# Altium PCB SystemStatusBoardPcbDoc.PcbDoc
Units mil, origin at the board's own origin, x right, y up, seen from the top; angles counter-clockwise.
Board outline 2900 x 2005 mil, 2 copper layers (Top Layer, Bottom Layer); 51 components, 32 nets, 205 pads, 46 vias.
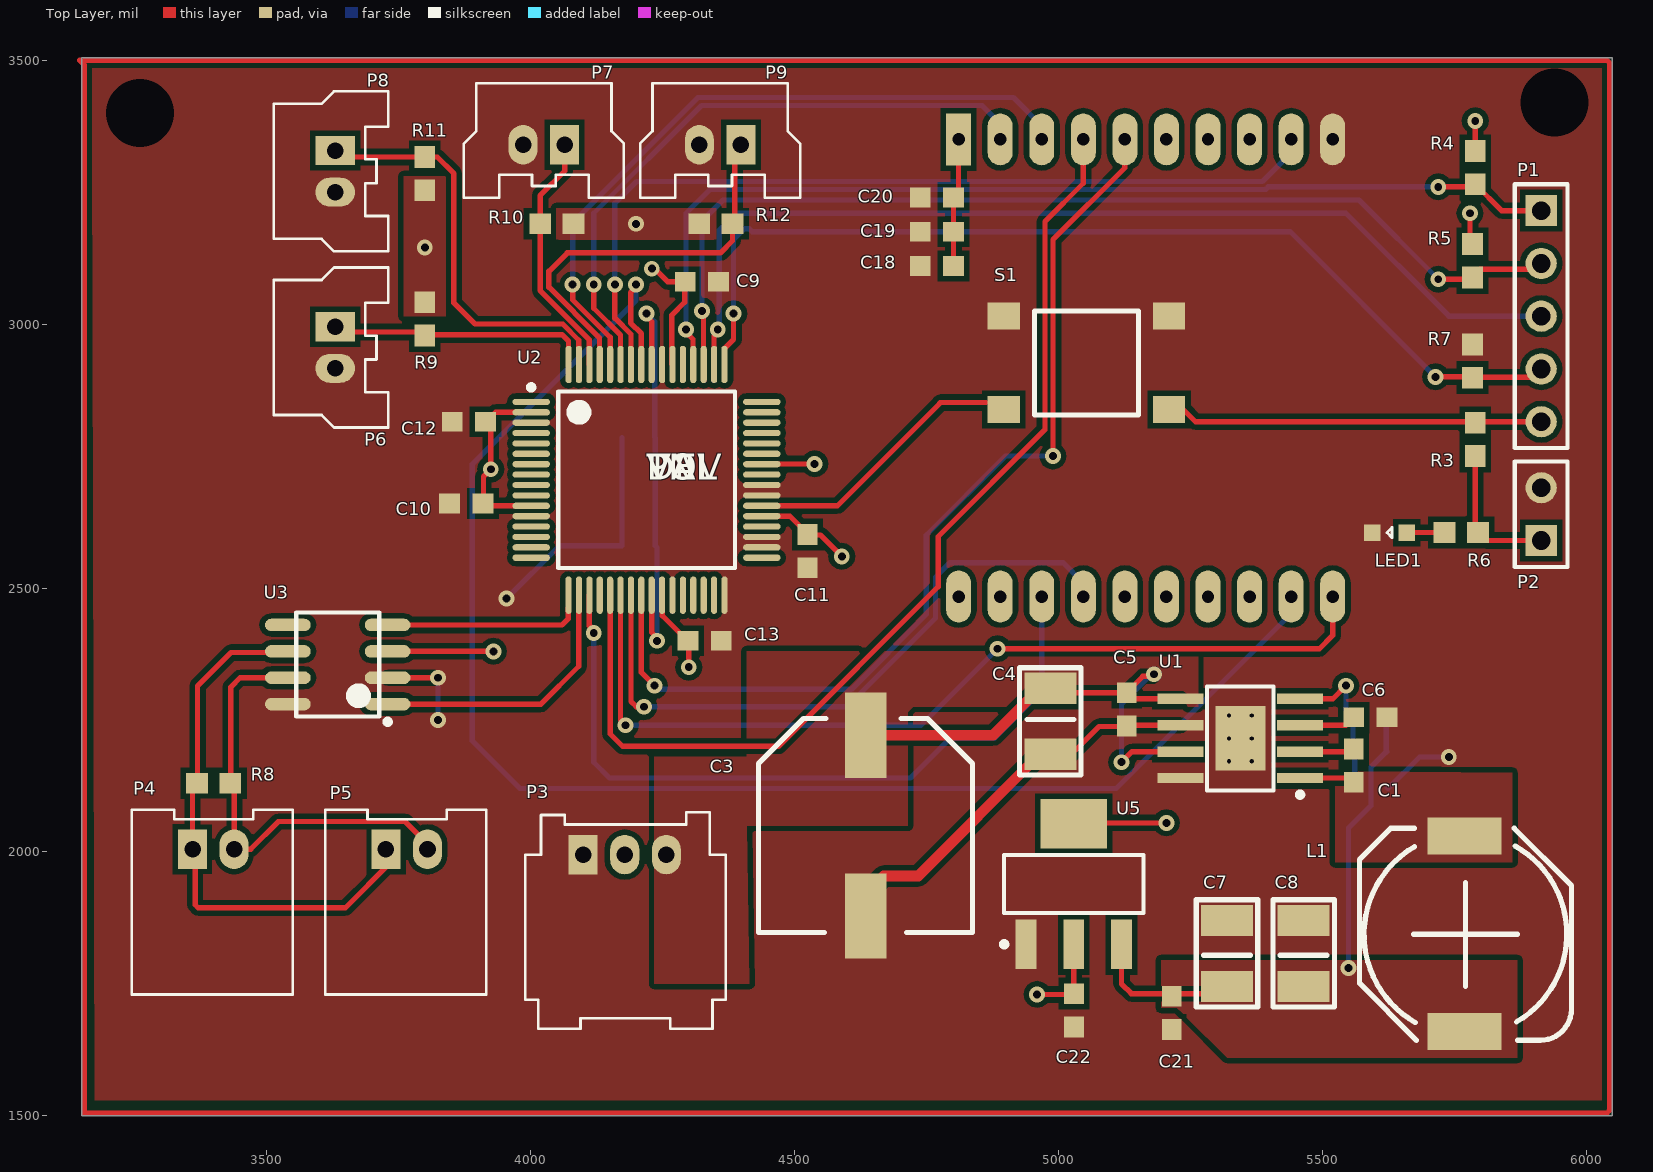
[diagram p0: Top Layer view]
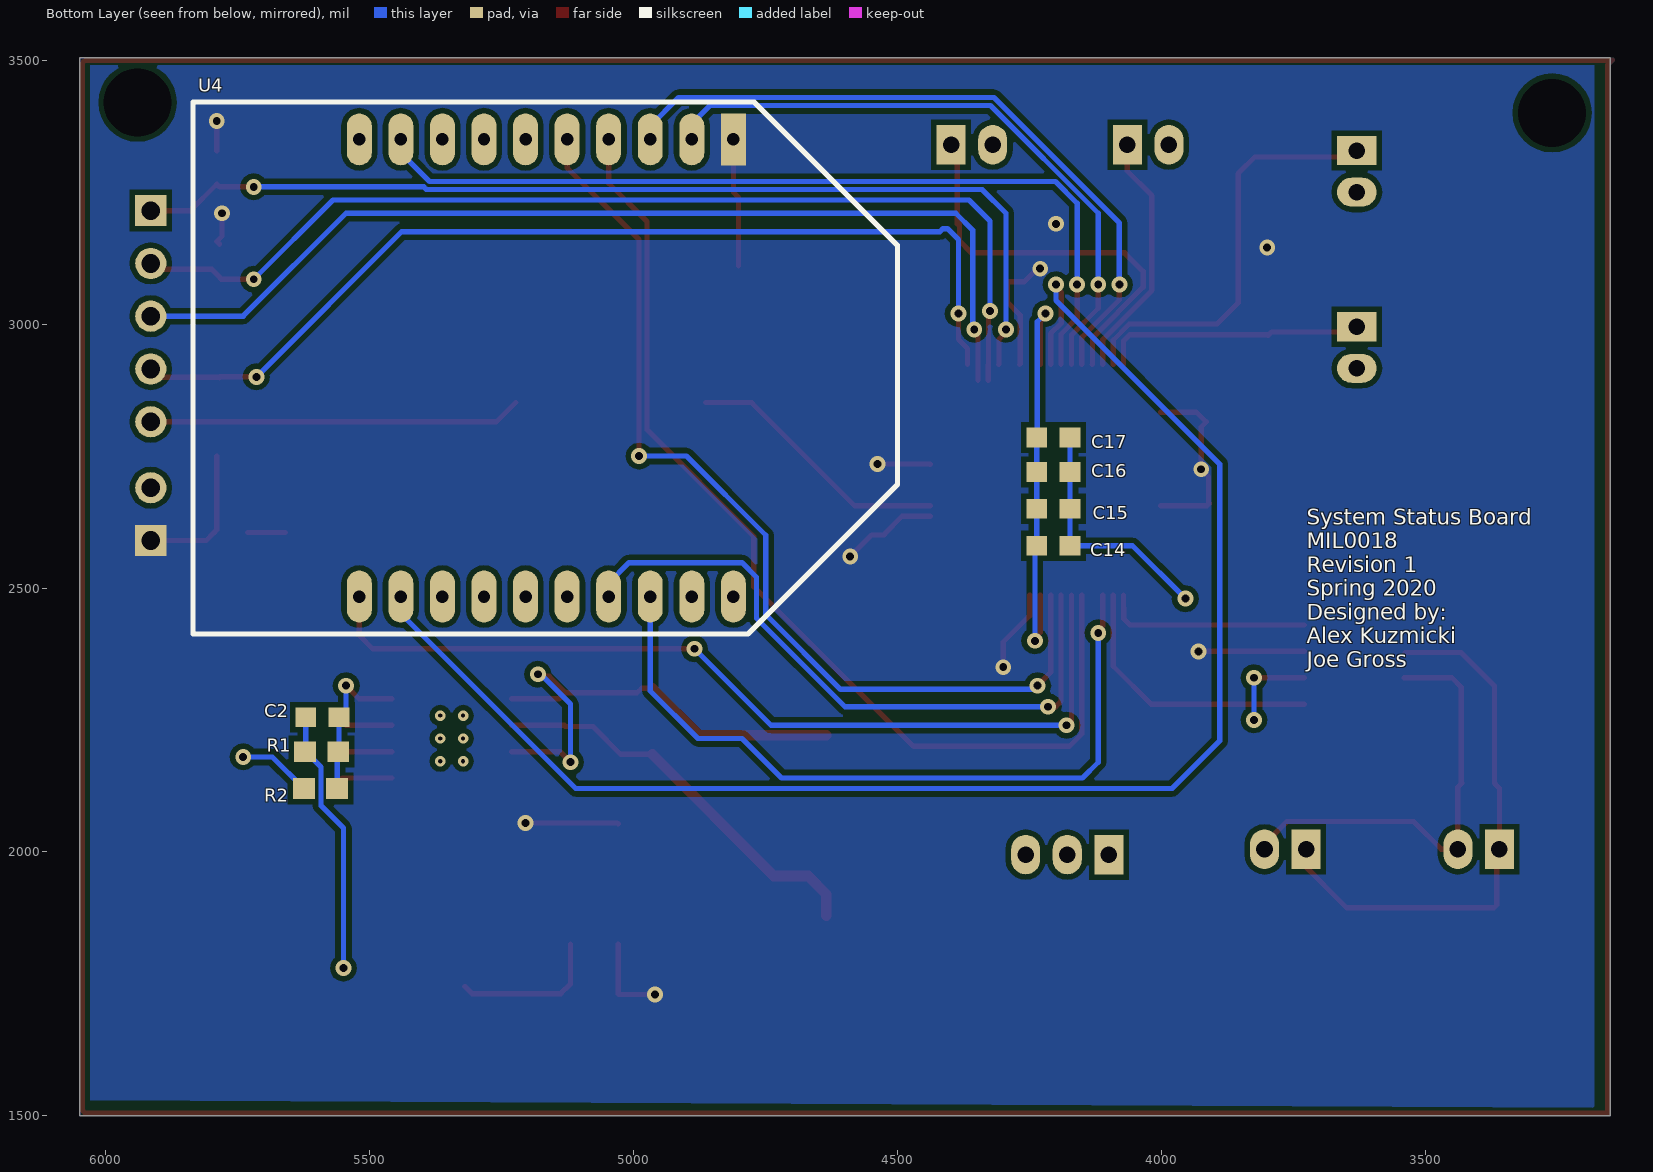
[diagram p1: Bottom Layer view, seen from below]

## Layer stack, top to bottom
Top Solder: solder mask 0.4, Solder Resist, Dk 3.5
Top Layer: signal copper 1.4
Dielectric 1: dielectric 12.6, FR-4, Dk 4.8
Bottom Layer: signal copper 1.4
Bottom Solder: solder mask 0.4, Solder Resist, Dk 3.5

## Board outline
3150,1500 6050,1500 6050,3505 3150,3505

## Design rules (kind name [scope] priority, off if disabled: settings)
Clearance [All] p1: gap=10 ignorepadtopadclearanceinfootprint=FALSE except(0: Arc-Hole Track-Hole SMDPad-Hole THPad-Hole Via-Hole Fill-Hole Poly-Hole Region-Hole Text-Hole; 5: Track-Track Track-SMDPad SMDPad-SMDPad; 7: Track-Via)
HoleSize [All] p1: absolutevalues=TRUE maxlimit=150 minlimit=10 maxpercent=80.000 minpercent=20.000
MinimumAnnularRing [All] p1: minimumring=7
MinimumSolderMaskSliver [All] p1: minsoldermaskwidth=1
PolygonConnect [All] p1: connectstyle=Direct reliefconductorwidth=10 reliefentries=4 polygonreliefangle="90 Angle" airgapwidth=10
RoutingVias [All] p1: holewidth=10 width=22 viastyle="Through Hole" minholewidth=10 minwidth=22 maxholewidth=100 maxwidth=150
SilkToSolderMaskClearance [IsPad] p1: minsilkscreentomaskgap=5 clearancetoexposedcopper=TRUE
SolderMaskExpansion [All] p1: expansion=4
Width [All] p1: maxlimit=150 minlimit=8 preferedwidth=10
27 further rules are at their usual default settings.

## Classes and differential pairs
component class SystemStatusBoard: C10 C11 C12 C13 C14 C15 C16 C17 C18 C19 C20 C21 C22 LED1 P1 P2 P3 P4 P5 P6 P7 P8 P9 R3 R4 R5 R6 R7 R8 R9 R10 R11 R12 S1 U2 U3 U4 U5
component class 24Vto5Vat1A-R1: C1 C2 C3 C4 C5 C6 C7 C8 L1 R1 R2 U1

## Components (designator, comment, footprint, x,y, rotation, side; value= is the part's Value field where it differs from the comment)
C1 "Cap" CAPC0603 5560,2163.5 r270 top value=470nF
C2 "Cap" CAPC0603 5590,2255 r180 bottom value=75pF
C3 "EEHZA1H101P" EEHZA1H101P 4635,2050 r0 top value=100uF
C4 "Cap" CAP1210 4985,2310.98 r90 top value=10uF
C5 "Cap" CAPC0603 5130,2270 r270 top value=100nF
C6 "Cap" CAPC0603 5591.5,2255 r0 top value=10uF
C7 "Cap" CAP1210 5320,1744.21 r270 top value=47uF
C8 "Cap" CAP1210 5465,1744.21 r270 top value=47uF
C9 "Cap" CAPC0603 4325,3080 r0 top value=0.1uF
C10 "Cap" CAPC0603 3878.5,2660 r180 top value=0.1uF
C11 "Cap" CAPC0603 4525,2570 r270 top value=0.1uF
C12 "Cap" CAPC0603 3883.5,2815 r180 top value=0.1uF
C13 "Cap" CAPC0603 4330,2400 r0 top value=2.1uF
C14 "Cap" CAPC0603 4205,2580 r180 bottom value=0.1uF
C15 "Cap" CAPC0603 4205,2650 r180 bottom value=0.1uF
C16 "Cap" CAPC0603 4205,2720 r180 bottom value=1.0uF
C17 "Cap" CAPC0603 4205,2785 r180 bottom value=2.2uF
C18 "Cap" CAPC0603 4770,3110 r180 top value=10uF
C19 "Cap" CAPC0603 4770,3175 r180 top value=1uF
C20 "Cap" CAPC0603 4770,3240 r180 top value=47pF
C21 "Cap" CAPC0603 5215,1695 r270 top value=1uF
C22 "Cap" CAPC0603 5030,1700 r270 top value=1uF
L1 "MSS1048-563MLB" MSS1048-563MLB 5770,1845 r0 top value=56uH
LED1 "LED" LED0603 5627.52,2605 r180 top
P1 "Header 5" HDR1X5 5915,3215 r270 top
P2 "Header 2" HDR1X2 5915,2590 r90 top
P3 "3pos RA sherlock connector" MOLEX-HDR-1X3-SHERLOCK-RA 4100,1995 r180 top
P4 "2-pin Horz Sherlock" MOLEX-HDR-1X2-SHERLOCK-HORZ 3360,2005 r180 top
P5 "2-pin Horz Sherlock" MOLEX-HDR-1X2-SHERLOCK-HORZ 3726.26,2005 r180 top
P6 "2-pin Vert Sherlock" MOLEX-HDR-1X2-SHERLOCK-VERT 3630,2995 r90 top
P7 "2-pin Vert Sherlock" MOLEX-HDR-1X2-SHERLOCK-VERT 4065,3340 r0 top
P8 "2-pin Vert Sherlock" MOLEX-HDR-1X2-SHERLOCK-VERT 3630,3328.74 r90 top
P9 "2-pin Vert Sherlock" MOLEX-HDR-1X2-SHERLOCK-VERT 4398.74,3340 r0 top
R1 "Res" RES0603 5591.5,2190 r180 bottom value=40.2k
R2 "Res" RES0603 5593.5,2120 r0 bottom value=10k
R3 "Res" RES0603 5790,2781.5 r90 top value=10k
R4 "Res" RES0603 5790,3296.5 r270 top value=10k
R5 "Res" RES0603 5785,3120 r270 top value=10k
R6 "Res" RES0603 5763.5,2605 r180 top value=10k
R7 "Res" RES0603 5785,2930 r90 top value=10k
R8 "Res" RES0603 3400,2130 r180 top value=120
R9 "Res" RES0603 3800,3010 r270 top value=1M
R10 "Res" RES0603 4050,3190 r180 top value=1M
R11 "Res" RES0603 3800,3285 r90 top value=1M
R12 "Res" RES0603 4351.5,3190 r0 top value=1M
S1 "Button" PTS645xxxxSMTR92 5053.5,2926.42 r180 top
U1 "LMR23610ADDAR" LMR23610ADDAR 5345,2215 r180 top
U2 "TM4C123GH6PMT7R" PM0064A_N 4220,2705 r0 top value=Value
U3 "SN65HVD230DR" SOIC-8pin 3635,2355 r180 top
U4 "XBee" XBee 4811.34,3350 r270 bottom
U5 "TLV1117LV33DCYR" SOT23-4N 5029.45,1939.17 r90 top

## Footprints (in the part's own frame and the unit in brackets; to place one, negate y for a bottom-side part, rotate by r counter-clockwise, add the part's x,y. Pads: shape width x height; smd on the part's side, far side on the other; paste and mask are expansions set on the pad)
CAP1210 [mm]
  rect 1.5x2.5 smd: 1(-0.02,0) 2(-3.2,0)
  silkscreen extent -4.2,-1.48 0.97,1.48, body extent -3.22,-1.25 0,1.26, height 2.5
CAPC0603 [mm] "Chip Capacitor, 2-Leads, Body 1.60x0.80mm, IPC Medium Density"
  rect 1x0.95 smd: 1(-0.8,0) 2(0.8,0)
  body extent -0.88,-0.48 0.87,0.48, height 0.8
EEHZA1H101P [mm] "CAP ALUM POLY HYB 100UF 50V SMD"
  rect 2x4.1 smd: 1(0,4.35) 2(0,-4.35)
  silkscreen extent -5.15,-5.15 5.15,5.15, body extent -5.24,-5.99 5.25,5.99, height 10.54
HDR1X2 [mm] "Connector; Header; 2 Position"
  rect 1.5x1.5 hole 0.9: 1(0,0)
  round 1.5 hole 0.9: 2(2.54,0)
  silkscreen extent -1.27,-1.27 3.81,1.27
HDR1X5 [mm] "Connector; Header; 5 Position"
  rect 1.5x1.5 hole 0.9: 1(0,0)
  round 1.5 hole 0.9: 2(2.54,0) 3(5.08,0) 4(7.62,0) 5(10.16,0)
  silkscreen extent -1.27,-1.27 11.43,1.27
LED0603 [mm] "Chip LED, 2-Leads, Body 1.60x0.80mm, IPC Medium Density"
  rect 0.8x0.8 smd: A(-0.825,0) C(0.825,0)
  silkscreen extent -0.13,-0.25 0.12,0.25, body extent -0.88,-0.48 0.87,0.47, height 0.8
LMR23610ADDAR [mm] "IC REG BUCK ADJ 1A SYNC 8SOPWRPD"
  rect 2.2x0.5 smd: 1(-2.875,1.905) 2(-2.875,0.635) 3(-2.875,-0.635) 4(-2.875,-1.905) 5(2.875,-1.905) 6(2.875,-0.635) 7(2.875,0.635) 8(2.875,1.905)
  rect 2.4x3.1 smd: 9(0,0)
  silkscreen extent -3,-2.5 1.6,2.83, body extent -2,-2.5 2,2.5, height 1.7
MOLEX-HDR-1X2-SHERLOCK-HORZ [mm]
  rect 1.397x1.905 hole 0.8: 1(0,0)
  oval 1.397x1.905 hole 0.8: 2(-2,0)
  silkscreen extent -4.83,-1.91 2.92,6.98, body extent -4.83,-1.91 2.87,8.59, height 5.54
MOLEX-HDR-1X2-SHERLOCK-VERT [mm]
  rect 1.397x1.905 hole 0.8: 1(0,0)
  oval 1.397x1.905 hole 0.8: 2(-2,0)
  silkscreen extent -4.85,-2.55 2.85,2.95, body extent -4.87,-2.59 2.83,2.96, height 8.5
MOLEX-HDR-1X3-SHERLOCK-RA [mm]
  rect 1.397x1.905 hole 0.8: 1(0,0)
  oval 1.397x1.905 hole 0.8: 2(-2,0) 3(-4,0)
  silkscreen extent -6.86,-2.03 2.79,8.38, body extent -6.88,-1.99 2.82,8.51, height 5.75
MSS1048-563MLB [mm] "FIXED IND 56UH 1.7A 126 MOHM"
  rect 3.56x1.78 smd: 1(0,4.7) 2(0,-4.7)
  silkscreen extent -5.06,-5.13 5.14,5.07, body extent -5.1,-5.15 5.1,5.15, height 5
PM0064A_N [mm]
  oval 1.8x0.3 smd paste-0.102 mask+0.051: 1(-5.55,3.75) 2(-5.55,3.25) 3(-5.55,2.75) 4(-5.55,2.25) 5(-5.55,1.75) 6(-5.55,1.25) 7(-5.55,0.75) 8(-5.55,0.25) 9(-5.55,-0.25) 10(-5.55,-0.75) 11(-5.55,-1.25) 12(-5.55,-1.75) 13(-5.55,-2.25) 14(-5.55,-2.75) 15(-5.55,-3.25) 16(-5.55,-3.75) 33(5.55,-3.75) 34(5.55,-3.25) 35(5.55,-2.75) 36(5.55,-2.25) 37(5.55,-1.75) 38(5.55,-1.25) 39(5.55,-0.75) 40(5.55,-0.25) 41(5.55,0.25) 42(5.55,0.75) 43(5.55,1.25) 44(5.55,1.75) 45(5.55,2.25) 46(5.55,2.75) 47(5.55,3.25) 48(5.55,3.75)
  oval 0.3x1.8 smd paste-0.102 mask+0.051: 17(-3.75,-5.55) 18(-3.25,-5.55) 19(-2.75,-5.55) 20(-2.25,-5.55) 21(-1.75,-5.55) 22(-1.25,-5.55) 23(-0.75,-5.55) 24(-0.25,-5.55) 25(0.25,-5.55) 26(0.75,-5.55) 27(1.25,-5.55) 28(1.75,-5.55) 29(2.25,-5.55) 30(2.75,-5.55) 31(3.25,-5.55) 32(3.75,-5.55) 49(3.75,5.55) 50(3.25,5.55) 51(2.75,5.55) 52(2.25,5.55) 53(1.75,5.55) 54(1.25,5.55) 55(0.75,5.55) 56(0.25,5.55) 57(-0.25,5.55) 58(-0.75,5.55) 59(-1.25,5.55) 60(-1.75,5.55) 61(-2.25,5.55) 62(-2.75,5.55) 63(-3.25,5.55) 64(-3.75,5.55)
  silkscreen extent -5.67,-4.25 4.25,4.57, body extent -4.19,-4.19 4.19,4.19, height 0.64
PTS645xxxxSMTR92 [mm] "PTS645 Series SMT 6 mm Tactile Switch"
  rect 1.555x1.3 smd: A(-3.975,2.25) A(3.975,2.25) B(-3.975,-2.25) B(3.975,-2.25)
  silkscreen extent -2.5,-2.5 2.5,2.5, body extent -3,-3 3,3, height 4.5
RES0603 [mm] "Chip Resistor, 2-Leads, Body 1.60x0.80mm, IPC Medium Density"
  rect 1.05x1 smd: 1(-0.8,0) 2(0.8,0)
  body extent -0.88,-0.48 0.87,0.47, height 0.8
SOIC-8pin [mm] "For 296-1345-1-ND"
  oval 2.2x0.6 smd: 1(-2.4,1.905) 2(-2.4,0.635) 3(-2.4,-0.635) 4(-2.4,-1.905) 5(2.4,-1.905) 6(2.4,-0.635) 7(2.4,0.635) 8(2.4,1.905)
  silkscreen extent -2.53,-2.5 2,2.88, body extent -2,-2.5 2,2.5, height 1.75
SOT23-4N [mm] "SOT223, 4-Leads, Body 6.50x7.00mm (avg), Pitch 2.30mm, IPC Medium Density"
  rect 2.4x1 smd: 1(-2.9,2.3) 2(-2.9,0) 3(-2.9,-2.3)
  rect 2.4x3.2 smd: 4(2.9,0)
  silkscreen extent -3.02,-3.35 1.4,3.47, body extent -1.85,-3.35 1.85,3.35, height 1.7
XBee [mm]
  rect 2.5x1.2 hole 0.6: 1(0,0)
  oval 2.5x1.2 hole 0.6: 2(0,-2) 3(0,-4) 4(0,-6) 5(0,-8) 6(0,-10) 7(0,-12) 8(0,-14) 9(0,-16) 10(0,-18) 11(22,-18) 12(22,-16) 13(22,-14) 14(22,-12) 15(22,-10) 16(22,-8) 17(22,-6) 18(22,-4) 19(22,-2) 20(22,0)
  silkscreen extent -1.8,-26 23.8,7.9, body extent -1.9,-26 23.8,8, height 4.06

## Part data
C1 C2 C4 C5 C6 C9 C10 C11 C12 C13 C14 C15 C16 C17 C18 C19 C20: Supplier Part Number 1=1276-1000-1-ND, Supplier 1=Digi-Key
C3: "CAP ALUM POLY HYB 100UF 50V SMD", Manufacturer 1=Panasonic, Supplier Part Number 1=P15442CT-ND, Tolerance=20%, Voltage=50V, ComponentLink1Description="Web Site", ComponentLink1URL=https://na.industrial.panasonic.com/products/capacitors/aluminum-electrolytic-capacitors/conductive-polymer-hybrid-aluminum-electrolytic/series/za-high-temp-reflow/ABA0135/model/EEHZA1H101P, ComponentLink2Description="Data Sheet", ComponentLink2URL=https://industrial.panasonic.com/cdbs/www-data/pdf/RDD0000/ABA0000C1221.pdf, ComponentLink3Description="ZA Series Technical Data", ComponentLink3URL=https://industrial.panasonic.com/cdbs/www-data/pdf/RDD0000/ABA0000COS44.pdf, Manufacturer Part Number 1=EEHZA1H101P, Supplier 1=Digi-Key
C7 C8: Supplier Part Number 1=490-6538-1-ND, Supplier 1=Digi-Key
C21 C22: Manufacturer Part Number=C0603C105K8PACTU, Supplier Part Number 1=399-3118-1-ND, Supplier 1=Digi-Key
L1: "FIXED IND 56UH 1.7A 126 MOHM", Manufacturer 1=Coilcraft, ComponentLink1Description="Web Site", ComponentLink1URL=https://www.coilcraft.com/mss1048.cfm, Manufacturer Part Number 1=MSS1048-563MLB, Supplier 1=Coilcraft, Supplier Part Number 1=MSS1048-563MLB
LED1: Color=Red, Supplier Part Number 1=754-1122-1-ND, Supplier 1=Digi-Key
P1: "Header, 5-Pin", LatestRevisionDate=17-Jul-2002, LatestRevisionNote="Re-released for DXP Platform.", Publisher="Altium Limited"
P2: "Header, 2-Pin", LatestRevisionDate=17-Jul-2002, LatestRevisionNote="Re-released for DXP Platform.", Publisher="Altium Limited"
P3: library part MOLEX-HDR-1x3-SHERLOCK_RA, "Header, Molex, 2mm Pitch Sherlock Header, Single Row, Right Angle 3 Circuits, Length 3.3mm", Manufacturer="Molex Connector Corporation", Manufacturer Part Number=35363-0360, Supplier Part Number 1=WM18932-ND, Supplier 1=Digi-Key
P4 P5: library part MOLEX-HDR-1x2-SHERLOCK_RA, "Header, Molex, 2mm Pitch Sherlock Header, Single Row, Horizontal, 2 Circuits, Length 3.3mm,  0353630260", Manufacturer="Molex Inc", Manufacturer Part Number=0353630260, Supplier Part Number 1=WM18931-ND, Supplier 1=Digi-Key
P6 P7 P8 P9: library part MOLEX-HDR-1x2-SHERLOCK_VERT, "Header, Molex, 2mm Pitch Sherlock Header, Single Row, Vertical, 2 Circuits, Length 3.3mm, 0353620250"
R1: Supplier Part Number 1=RMCF0603FT40K2CT-ND, Supplier 1=Digi-Key
R2 R3 R4 R5 R6 R7 R8 R9 R10 R11 R12: Supplier Part Number 1=RMCF0603JT10K0CT-ND, Supplier 1=Digi-Key
S1: "SPST Button", Supplier Part Number 1=CKN9087CT-ND, Supplier 1=Digi-Key
U1: "IC REG BUCK ADJ 1A SYNC 8SOPWRPD", Manufacturer 1="Texas Instruments", Supplier Part Number 1=296-47267-1-ND, ComponentLink1Description=Datasheet, ComponentLink1URL=http://www.ti.com/lit/ds/symlink/lmr23610.pdf, ComponentLink2Description="Web Site", ComponentLink2URL=http://www.ti.com/product/LMR23610/description, Manufacturer Part Number 1=LMR23610ADDAR, Supplier 1=Digi-Key
U2: "Imported", Alternate_PartNumber=TM4C123GH6PMT, Manufacturer="Texas Instruments", PartNumber=TM4C123GH6PMTR, CompType=IC, MountType=SMT, PackageReference=PM0064A, PIN_COUNT=64, RefDes=RefDes, RoHS=Y, TYPE=TYPE
U3: "IC TXRX CAN 1MBPS 3.3V 8SOIC", Supplier Part Numbe 1=296-11654-1-ND, Supplier 1=Digi-Key
U4: "XBee radio", Supplier Part Number 1=602-1181-ND, Supplier 1=Digi-Key
U5: "IC REG LINEAR 3.3V 1A SOT223-4", Digi-Key Part Number=296-28778-1-ND

## Free pads (board coordinates)
  round 60 hole 129: 5(3260,3400) 5(5940,3420)

## Via types
v1: diameter 30, hole 15, Top Layer to Bottom Layer, tented both sides, 40 vias
v2: diameter 19.68, hole 7.87, Top Layer to Bottom Layer, tented both sides, 6 vias

## Nets (pads, with @x,y where several pads share a name; then routed paths per layer and width w, separated by ;. In a path a pad name is that pad's centre, name@x,y a point inside that pad or via, vN(x,y) a via of type N, cw(c..) or ccw(c..) an arc to the next point about the centre after c; other vN are vias at no path point)
CAN1_RX: U2.17 U3.4 | length 391.6
  Top Layer w10: U3.4 4060,2430 4071.53,2441.53 4071.53,2461.97 4072.02,2462.46 U2.17@4072.02,2486.15
CAN1_TX: U2.18 U3.1 | length 526.9
  Top Layer w10: U3.1 4020,2280 4091.7,2351.7 4091.7,2486.15 U2.18
CTS(L): U2.57 U4.12 | length 2941.3
  Top Layer w10: v1(4200,3075) 4200,3069.59 4190,3059.59 4190,3002.43 4210.16,2982.27 U2.57
  Bottom Layer w10: v1(4200,3075) 4200,3045 3890,2735 3890,2210 3980,2120 5110,2120 5441.18,2451.18 U4.12@5441.18,2483.86 ; U4.12 U4.12@5441.26,2509.45
GND: C3.2 C4.2 C5.2 C6.2 C7.2 C8.2 C9.2 C10.2 C11.2 C12.2 C13.2 C14.2 C15.2 C16.2 C17.2 C18.2 C19.2 C20.2 C21.2 C22.2 LED1.C P2.2 P3.1 P6.2 P7.2 P8.2 P9.2 pad.5 R2.2 R7.2 S1.B U1.6 U1.8 U1.9 U2.3 U2.12 U2.27 U2.32 U2.34 U2.35 U2.39 U2.40 U2.55 U3.2 U3.8 U4.10 U5.1 | length 1549.4
  Top Layer w10: U3.2 v1@3820,2330 ; C4.2@4965.31,2185 C4.2 5025,2185 5077.52,2237.52 5130,2237.52 C5.2 5131.5,2240 U1.6
  Top Layer w20: C3.2 4635,1920.08 4669.37,1954.45 4734.76,1954.45 C4.2@4965.31,2185
  Bottom Layer w10: v1(3825,2250) v1(3825,2330) ; v1(3955,2480) 4055,2580 C14.2 C15.2 C16.2 C17.2 ; R2.2@5622.99,2122.01 R2.2 5685,2180 v1(5740,2180)
  other v2: 5323.35,2171.69 5366.65,2171.69 5323.35,2215 5366.65,2215 5323.35,2258.31 5366.65,2258.31
Leak0: P6.1 R9.2 U2.64 | length 494.1
  Top Layer w10: P6.1@3635,2975 3645,2985 3791.5,2985 3797.99,2978.5 3799.49,2980 4060,2980 4072.36,2967.64 U2.64
Leak1: P8.1 R11.2 U2.63 | length 791.2
  Top Layer w10: P8.1@3635,3313.74 3637.76,3316.5 R11.2 3823.5,3316.5 3855,3285 3855,3040 3895,3000 4061.21,3000 4091.7,2969.51 4091.7,2923.85 U2.63
Leak2: P7.1 R10.2 U2.62 | length 474.4
  Top Layer w10: P7.1 4065,3290 4018.5,3243.5 R10.2 4018.5,3063.92 4111.39,2971.04 4111.39,2923.85 U2.62
Leak3: P9.1 R12.2 U2.61 | length 779.3
  Top Layer w10: U2.61 4131.07,2923.85 4131.07,2973.93 4035,3070 4035,3100 4070,3135 4360,3135 4382.99,3157.99 R12.2 4387.01,3190 4387.01,3328.27 P9.1
NetC1_1: C1.1 U1.2 | length 103.9
  Top Layer w10: U1.2 5555,2190 C1.1
NetC1_2: C1.2 L1.1 U1.1 | length 105.1
  Top Layer w10: U1.1 5552.01,2140 C1.2
NetC2_2: C2.2 R1.2 R2.1 U1.4 | length 299.2
  Top Layer w10: U1.4 5520,2290 v1(5545,2315)
  Bottom Layer w10: v1(5545,2315) 5545,2268.5 C2.2 5558.5,2191.5 R1.2 5562.01,2187.99 R2.1
NetC6_1: C6.1 U1.3 | length 108
  Top Layer w10: U1.3 5545,2240 C6.1
NetLED1_A: LED1.A R6.2 | length 72
  Top Layer w10: LED1.A R6.2
NetP4_1: P4.1 P5.1 R8.2 U3.6 | length 1071.8
  Top Layer w10: R8.2 R8.2@3369.49,2130 ; U3.6@3538.23,2377.72 3432.72,2377.72 3369.49,2314.49 R8.2@3369.49,2130 ; P5.1 3726.26,1995 3735,1986.26 3735,1980 3649.14,1894.14 3370.86,1894.14 3365,1900 3365,1993.76 3376.24,2005 P4.1 3360,2120.51 R8.2@3369.49,2130
NetP4_2: P4.2 P5.2 R8.1 U3.7 | length 850.6
  Top Layer w10: U3.7 3450,2330 3432.48,2312.48 3432.48,2130 R8.1 3438.74,2122.76 P4.2 3470,2005 3522.5,2057.5 3762.5,2057.5 3805,2015 P5.2 P5.2@3810.83,2010.83
RST_N: P1.5 R3.2 S1.A U2.38 | length 1213.1
  Top Layer w10: U2.38 4581.77,2655.79 4775,2849.02 4775,2850 4776.42,2851.42 4863.5,2851.42 ; S1.A@5223.58,2851.42 5260,2815 P1.5
Sleep: U2.58 U4.9 | length 1664.3
  Top Layer w10: v1(4160,3075) 4160,3011.21 4190.47,2980.74 U2.58
  Bottom Layer w10: v1(4160,3075) 4160,3228.89 4201.11,3270 5386.77,3270 5441.18,3324.41 U4.9@5441.18,3350
"SPI CLK": U2.19 U4.18 | length 1428.2
  Top Layer w10: U2.19 4111.73,2428.68 4120,2420.41 v1(4120,2415)
  Bottom Layer w10: v1(4120,2415) 4120,2170 4150,2140 4720,2140 4795,2215 4878.59,2215 4968.74,2305.15 U4.18@4968.74,2483.86
  other v1: 4120,2415
"SPI MISO": U2.21 U4.4 | length 1980.6
  Top Layer w10: U2.21 4151.1,2223.9 4175,2200 4470,2200 4772.64,2502.64 4772.64,2597.64 4975,2800 4975,3194.4 5047.48,3266.88 U4.4@5047.48,3350
"SPI MOSI": U2.22 U4.11 | length 1734.6
  Top Layer w10: U2.22 4170.79,2249.21 v1(4180,2240) ; v1(4885,2385) 5495,2385 5519.92,2409.92 U4.11@5519.92,2483.86
  Bottom Layer w10: v1(4180,2240) 4740,2240 v1(4885,2385)
"SPI SS": U2.23 U4.17 | length 1262.8
  Top Layer w10: U2.23 4190.75,2486.22 4190.75,2285 4200.75,2275 v1(4215,2275)
  Bottom Layer w10: v1(4215,2275) 4600,2275 4767.63,2442.63 4767.63,2520.44 4795.26,2548.07 5008.86,2548.07 5047.48,2509.45 U4.17@5047.48,2483.86
TCK/SWCLK: P1.1 R4.2 U2.52 | length 1955.6
  Top Layer w10: v1(4295,2990) 4295,2984.59 4308.24,2971.35 4308.24,2923.85 U2.52 ; v1(5720,3260) 5785,3260 R4.2 5840,3215 P1.1
  Bottom Layer w10: v1(4295,2990) 4295,3210 4340,3255 5392.99,3255 5397.99,3260 v1(5720,3260)
TDI: P1.3 U2.50 | length 1939.7
  Top Layer w10: U2.50@4347.95,2893.49 U2.50 4347.95,2977.54 4355,2984.59 v1(4355,2990)
  Bottom Layer w10: v1(4355,2990) 4358,2993 4358,3178 4390,3210 5545,3210 5740,3015 P1.3
TDO/SWO: P1.4 R7.1 U2.49 | length 1906.7
  Top Layer w10: U2.49 4367.64,2953.52 4385,2970.88 v1(4385,3020) ; v1(5715,2900) 5783.5,2900 R7.1 5785,2899.49 5899.49,2899.49 P1.4
  Bottom Layer w10: v1(4385,3020) 4385,3160 4405.86,3180.86 4414.14,3180.86 4420,3175 5440,3175 v1(5715,2900)
TMS/SWDIO: P1.2 R5.2 U2.51 | length 1984.6
  Top Layer w10: v1(4325,3025) 4327.92,3022.08 4327.92,2923.85 U2.51 U2.51@4328.27,2893.49 ; v1(5720,3085) 5781.5,3085 R5.2 5785,3089.49 5799.69,3104.17 5890.9,3104.17 5901.73,3115 P1.2
  Bottom Layer w10: v1(4325,3025) 4325,3195 4365,3235 5570,3235 v1(5720,3085)
"UART5 RX": U2.59 U4.2 | length 1231.9
  Top Layer w10: v1(4120,3075) 4120,3030 4170.79,2979.21 U2.59
  Bottom Layer w10: v1(4120,3075) 4120,3210.1 4324.11,3414.21 4855.79,3414.21 4890,3380 U4.2@4890,3350 ; U4.2@4890.08,3324.41 U4.2
"UART5 TX": U2.60 U4.3 | length 1332.3
  Top Layer w10: v1(4080,3075) 4080,3046.21 4151.1,2975.11 U2.60
  Bottom Layer w10: v1(4080,3075) 4080,3191.32 4317.9,3429.21 4915.12,3429.21 4968.74,3375.59 U4.3@4968.74,3350
VDD: C9.1 C10.1 C11.1 C12.1 C13.1 C18.1 C19.1 C20.1 C22.1 P2.1 R3.1 R4.1 R5.1 R6.1 R9.1 R10.1 R11.1 R12.1 U2.2 U2.11 U2.26 U2.37 U2.42 U2.54 U3.3 U4.1 U5.2 U5.4 | length 2224.2
  Top Layer w10: U3.3 v1(3930,2380) ; U2.11 3914.21,2655.79 C10.1 3910.98,2660 3910.98,2710.98 v1(3925,2725) 3925,2805 C12.1 3915.98,2815 3933.94,2832.95 U2.2 ; v1(4230,3105) 4235.41,3105 4260.41,3080 C9.1@4292.52,3080 ; U2.26 4249.87,2486.15 4249.87,2447.65 4300,2397.52 v1(4300,2350) v1@4305,2345 ; U2.54 4268,2924.72 4268,3017.15 4292.52,3041.67 C9.1@4292.52,3080 ; C9.1 C9.1@4292.52,3080 ; U2.37 4491.38,2636.1 4525,2602.48 C11.1 4525,2600.51 4549.49,2600.51 v1(4590,2560) ; U2.42 4438.85,2734.87 4538.18,2734.87 v1(4538.55,2735.25) ; C18.1 C19.1 C20.1 4811.26,3249.76 U4.1 ; v1(4960,1730) 5028.5,1730 C22.1 5029.45,1732.05 U5.2 ; U5.4 5031.1,2055 v1(5205,2055) ; v1(5780,3210) 5780,3166.5 5790,3156.5 R5.1 ; R3.1 5790,2610 R6.1 ; R4.1 v1(5790,3385) ; R6.1@5794.02,2605 R6.1 ; P2.1 5810,2590 R6.1
  other v1: 3800,3145 4200,3190
VDDC: C14.1 C15.1 C16.1 C17.1 U2.25 U2.56 | length 820.1
  Top Layer w10: v1(4220,3020) 4220,3014.59 4229.84,3004.75 U2.56 ; U2.25 4229.84,2415.57 4240,2405.41 v1(4240,2400)
  Bottom Layer w10: v1(4220,3020) 4235.51,3004.49 4235.51,2785 C17.1 C16.1 C15.1 C14.1 4240,2576.5 v1(4240,2400)
VIN: C3.1 C4.1 C5.1 P3.3 U1.5 U1.7 | length 1016.7
  Top Layer w10: C4.1@4965.31,2310.2 C4.1 4993.7,2301.5 C5.1 ; v1(5120,2170) 5140,2190 U1.7 ; v1(5181.73,2336.57) 5177.9,2332.75 5160.27,2332.75 5130,2302.48 C5.1 ; U1.5 5141.5,2290 C5.1
  Top Layer w20: C3.1 4876.38,2221.26 C4.1@4965.31,2310.2
  Bottom Layer w10: v1(5120,2170) 5120,2280 v1@5175,2335
Vout: C2.1 C7.1 C8.1 C21.1 L1.2 R1.1 U5.3 | length 794.7
  Top Layer w10: U5.3 5120,1750 5138.5,1731.5 5306.5,1731.5 C7.1
  Bottom Layer w10: v1(5550,1780) 5550,2045 5592.68,2087.68 5592.68,2160.67 5622.01,2190 R1.1 5621.5,2191.5 C2.1
"Zigbee Reset": U2.24 U4.5 | length 1867.1
  Top Layer w10: U2.24 4210.16,2339.84 v1(4235,2315) ; v1(4990,2750) 4990,3160 5126.22,3296.22 U4.5@5126.22,3350
  Bottom Layer w10: v1(4235,2315) 4242,2308 4608,2308 4750,2450 4750,2600 4900,2750 v1(4990,2750)
pads on no net: P3.2 U2.1 U2.4 U2.5 U2.6 U2.7 U2.8 U2.9 U2.10 U2.13 U2.14 U2.15 U2.16 U2.20 U2.28 U2.29 U2.30 U2.31 U2.33 U2.36 U2.41 U2.43 U2.44 U2.45 U2.46 U2.47 U2.48 U2.53 U3.5 U4.6 U4.7 U4.8 U4.13 U4.14 U4.15 U4.16 U4.19 U4.20
copper on no net: | length 9776.1
  Top Layer w10: 3145.86,3500 3155,3490.86 3155,1537.57 3155,1505 3175,1505 6039.14,1505 6045,1510.86 6045,3494.14 6039.14,3500 3154.81,3500 3145.86,3500

## Polygon pours and split planes (outlines as drawn)
GND on Top Layer "Top Layer-GND" (solid, pour order 32): 3169.94,3490.06 3175,1530 6030,1530 6030,3490.06
VIN on Top Layer "Top Layer-VIN" (solid, pour order 2): 4235,2050 4715,2050 4715,2265 4725,2275 5265,2275 5265,2380 4410,2380 4410,2210 4410,2180 4235,2180
VIN on Top Layer "Top Layer-VIN 1" (solid, pour order 30): 4235,2050 4235,1750 4410,1750 4415.08,1750.39 4409.83,2050
VDD on Top Layer "Top Layer-VDD" (solid, pour order 28): 4045,3219.42 4045,3159.42 4072.69,3159.42 4360,3159.42 4360,3219.42
VDD on Top Layer "Top Layer-VDD 1" (solid, pour order 18): 3760,3280 3840,3280 3840,3015 3760,3015
Vout on Top Layer "Top Layer-Vout" (solid, pour order 6): 5195,1795 5870,1795 5870,1610 5320,1610 5225,1705 5195,1705
NetC1_2 on Top Layer "Top Layer-NetC1_2" (solid, pour order 0): 5525,2152.93 5525,2140 5525,1980 5860,1980 5860,2040 5860,2150
no net on Top Layer "Top Layer-No Net" (solid, pour order 26): 3815,3185
no net on Top Layer "Top Layer-No Net 1" (solid, pour order 24): 3815,3185
no net on Top Layer "Top Layer-No Net 2" (solid, pour order 22): 3815,3185
no net on Top Layer "Top Layer-No Net 3" (solid, pour order 20): 3795,3170
no net on Top Layer "Top Layer-No Net 4" (solid, pour order 16): 3850,2875
no net on Top Layer "Top Layer-No Net 5" (solid, pour order 12): 5370,1655
no net on Top Layer "Top Layer-No Net 6" (solid, pour order 10): 5370,1655
no net on Top Layer "Top Layer-No Net 7" (solid, pour order 8): 5365,1630
VDD on Bottom Layer "VDD" (solid, pour order 38): 3180,3490 6030,3490 6030,1560 6030,1530 3180,1515
no net on Bottom Layer "Bottom Layer-No Net 1" (solid, pour order 36): 3210,3240
no net on Bottom Layer "Bottom Layer-No Net" (solid, pour order 4): 4235,2045

## Silkscreen, mask and mechanical layers (free items; w line width, h text height)
Bottom Overlay:
  text "System Status Board / MIL0018 / Revision 1 / Spring 2020 / Designed by:  / Alex Kuzmicki / Joe Gross" at 3725,2350 h30

## Text inside footprints (layer, text, board x,y; h text height)
U2: Top Overlay "DEV" at 4220,2705 h50; Top Overlay "PN" at 4220,2705 h50; Top Overlay "VAL" at 4220,2705 h50; Top Overlay "TOL" at 4220,2705 h50